# Altium PCB BMW E34 Start-Stop Btn.PcbDoc
Units mm, origin at the board's own origin, x right, y up, seen from the top; angles counter-clockwise.
Board outline 152.4 x 101.6 mm, 2 copper layers (Top Layer, Bottom Layer); 33 components, 16 nets, 88 pads, 5 vias.
Unrouted connection lines stored in the file: 2.
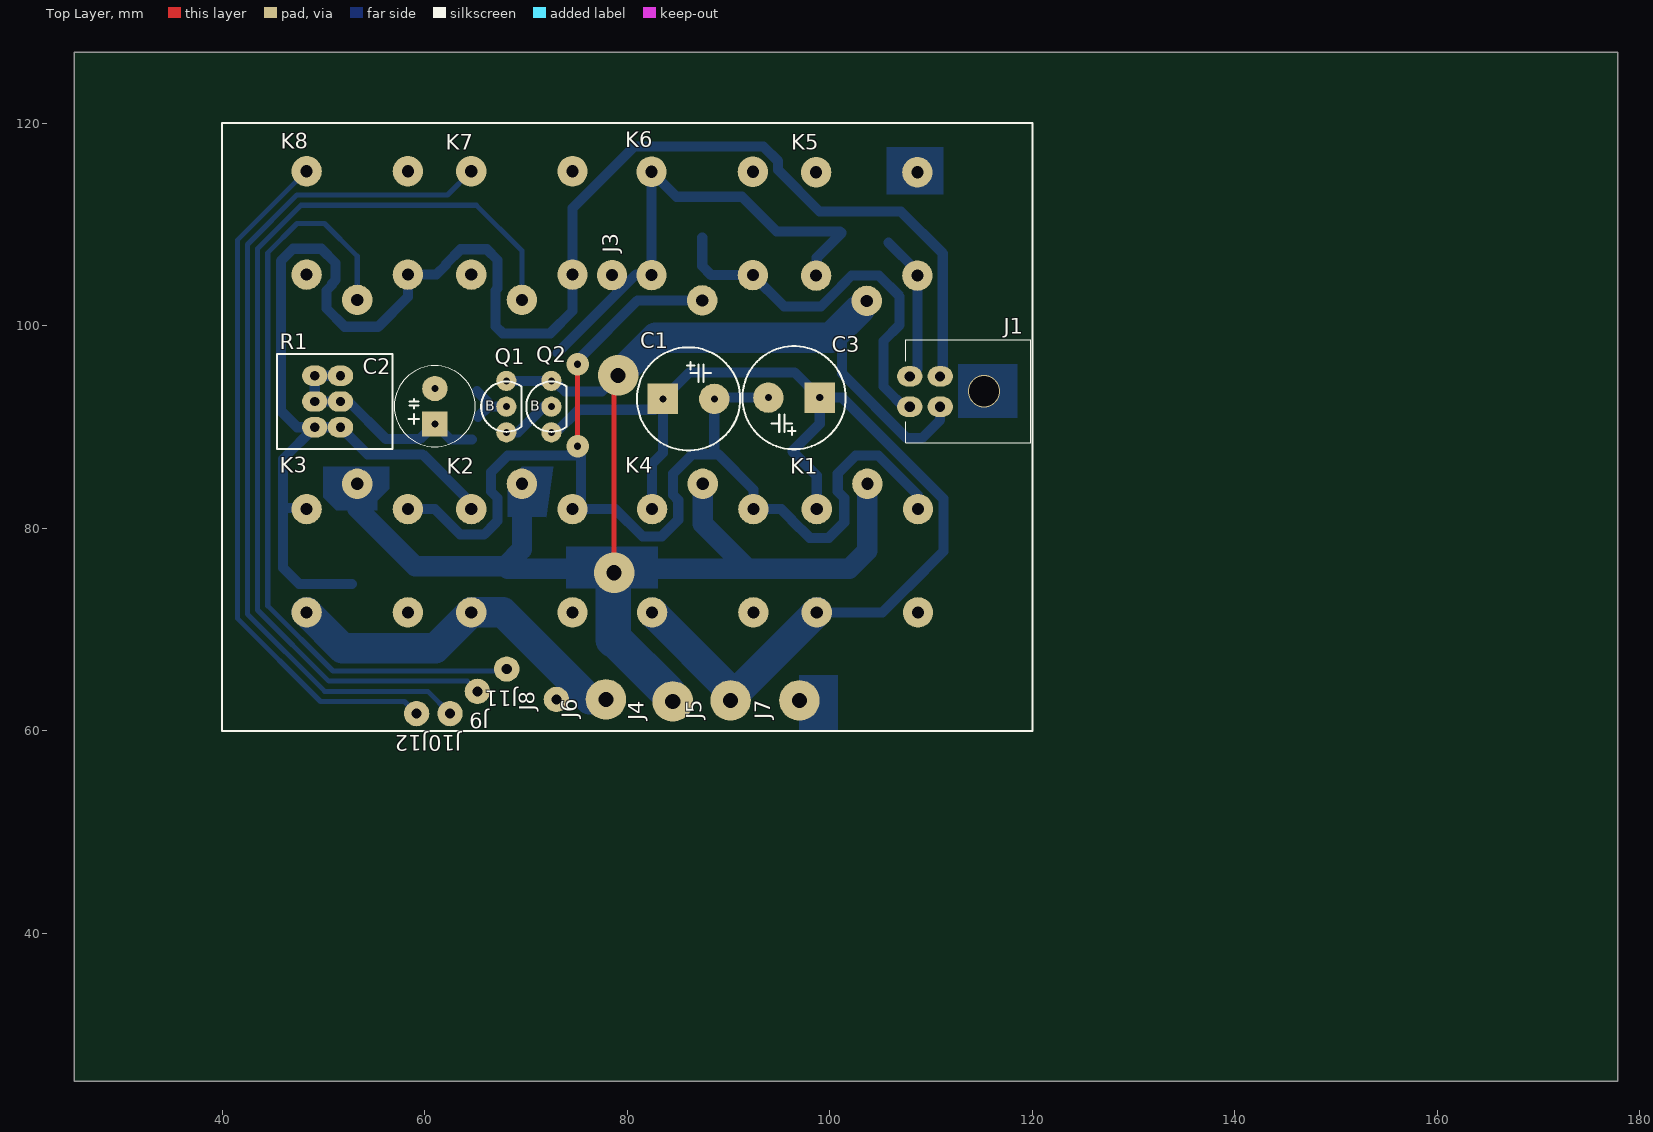
[diagram p0: Top Layer view]
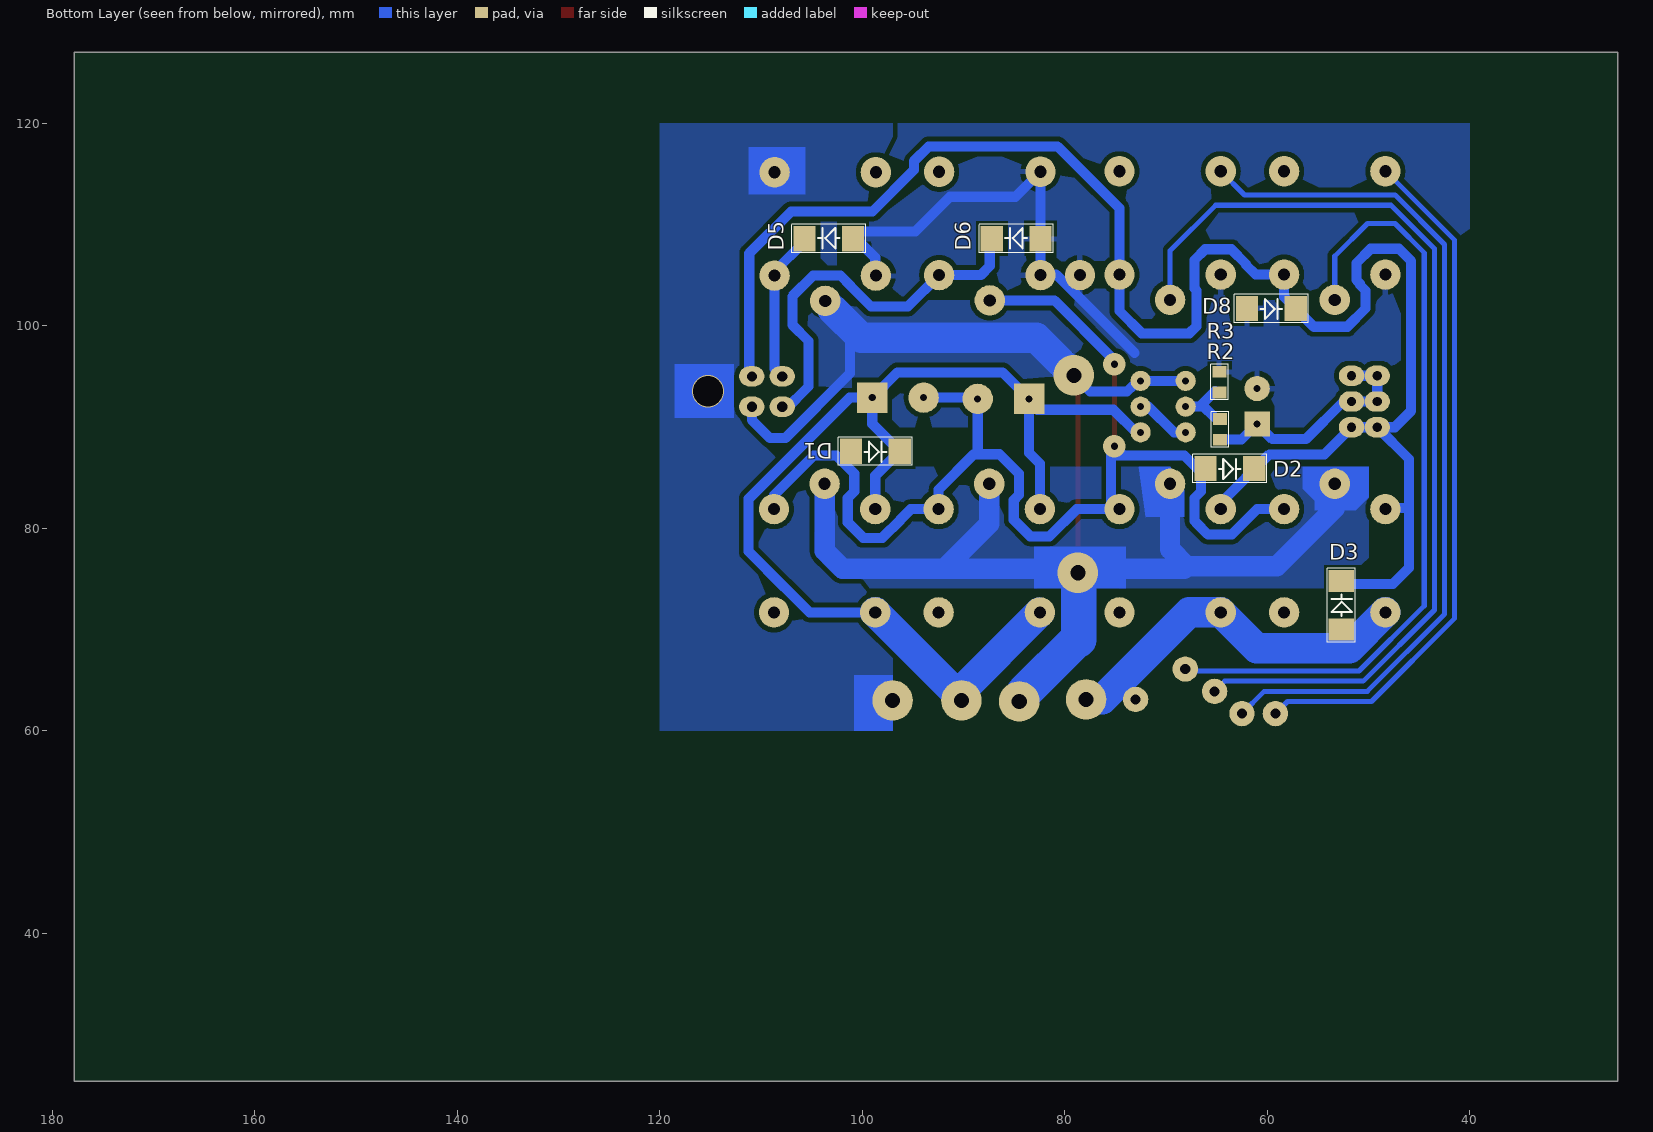
[diagram p1: Bottom Layer view, seen from below]
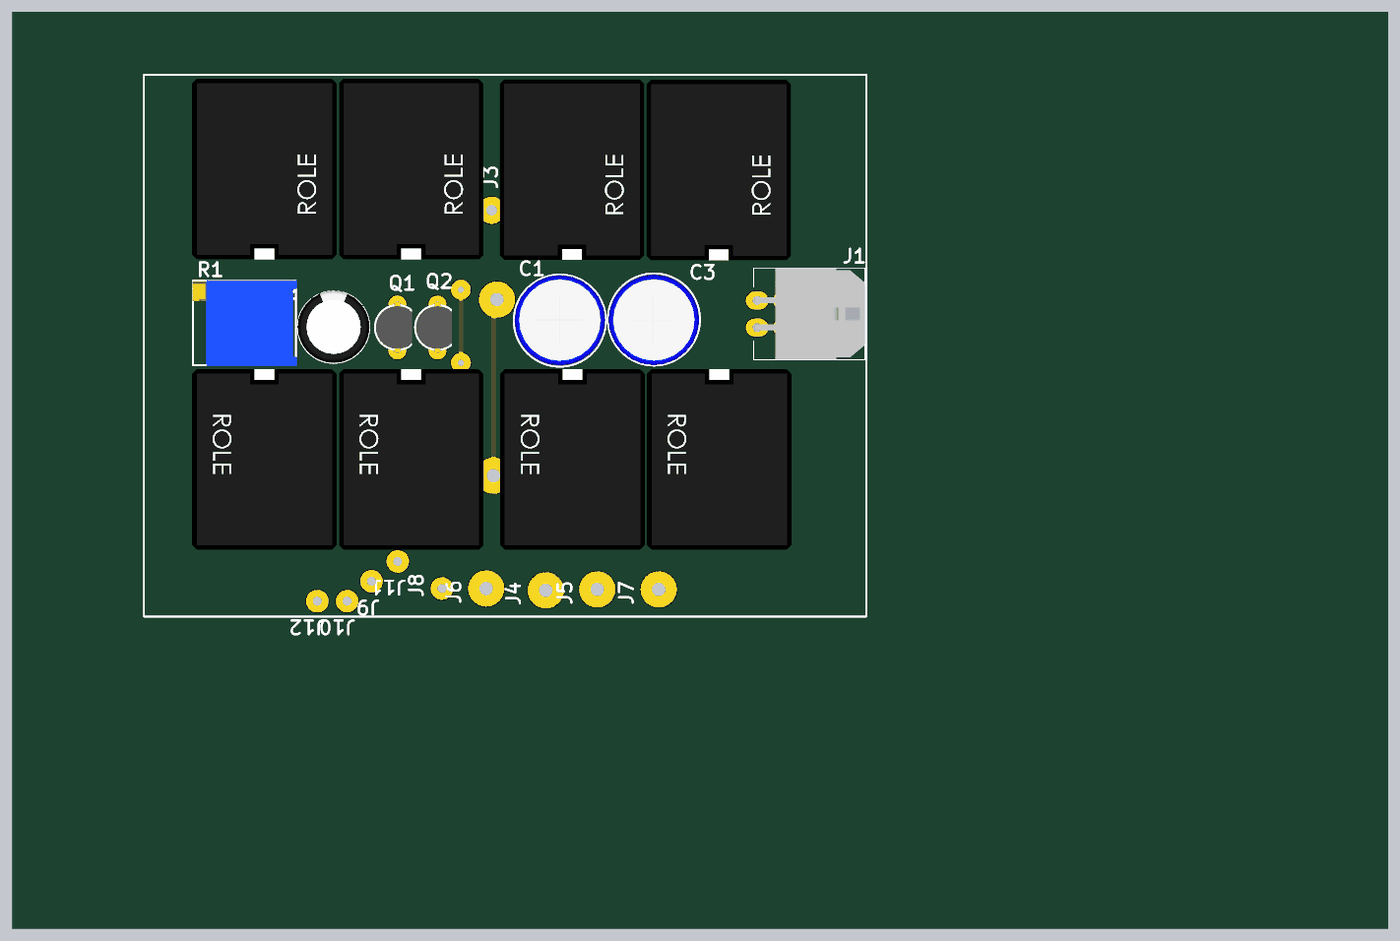
[diagram p2: 3D render of the assembled board from above, using the file's embedded part models]
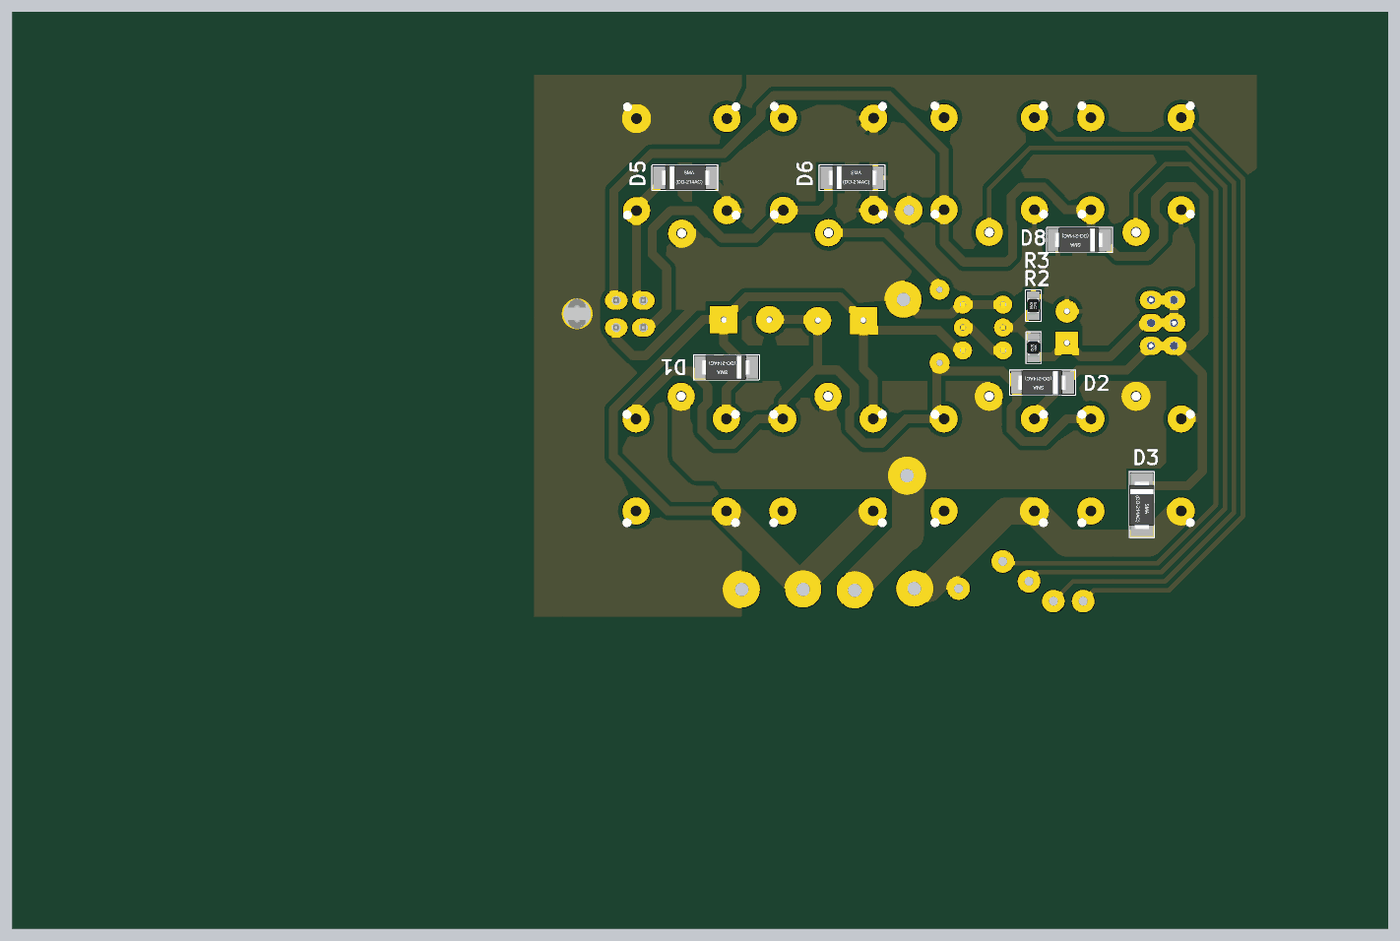
[diagram p3: 3D render of the assembled board from below, using the file's embedded part models]

## Layer stack, top to bottom
Top Solder: solder mask 0.0102, Solder Resist, Dk 3.5
Top Layer: signal copper 0.0356
Dielectric 1: dielectric 0.32, FR-4, Dk 4.8
Bottom Layer: signal copper 0.0356
Bottom Solder: solder mask 0.0102, Solder Resist, Dk 3.5

## Board outline
25.4,25.4 177.8,25.4 177.8,127 25.4,127

## Design rules (kind name [scope] priority, off if disabled: settings)
Clearance [All] p1: gap=0.5
ComponentClearance [All] p1: gap=0 collisioncheckmode=3 verticalgap=0 showdistances=FALSE
PlaneConnect [All] p1: planeconnectstyle=Relief reliefexpansion=0.508 reliefentries=4 reliefconductorwidth=0.5 reliefairgap=0.5
PolygonConnect [All] p1: connectstyle=Relief reliefconductorwidth=0.5 reliefentries=4 polygonreliefangle="90 Angle" airgapwidth=0.5
RoutingVias [All] p1: holewidth=0.711 width=1.27 viastyle="Through Hole" minholewidth=0.711 minwidth=1.27 maxholewidth=0.711 maxwidth=1.27
SolderMaskExpansion [All] p1: expansion=0.102
Width [All] p1: maxlimit=5 minlimit=0.5 preferedwidth=2
27 further rules are at their usual default settings.

## Components (designator, comment, footprint, x,y, rotation, side; value= is the part's Value field where it differs from the comment)
C1 "1000mF" "Cap E p5.08mm D10.2mm (3p)" 83.516,92.773 r0 top
C2 "330uF" "Cap E p3.5mm D8xH12" 61,90.3 r90 top
C3 "1000mF" "Cap E p5.08mm D10.2mm (3p)" 99.01,92.9 r180 top
D1 "S1M" DO-214AC 101.1,87.6 r180 bottom
D2 "S1M" DO-214AC 66.1,85.9 r180 bottom
D3 "S1M" DO-214AC 52.7,70 r90 bottom
D5 "S1M" DO-214AC 100.9,108.6 r0 bottom
D6 "S1M" DO-214AC 82.4,108.6 r0 bottom
D8 "S1M" DO-214AC 62,101.7 r180 bottom
J1 "Ing Button" "Molex Micro-Fit 3.0 - 4 pin D R" 110.9,95 r90 top
J3 "GND" "OnePin 1.2x3" 78.5,105 r90 top
J4 "RED" "OnePin 1.5x4" 84.5,62.9 r90 top
J5 "GREEN" "OnePin 1.5x4" 90.2,63 r90 top
J6 "FIOLET" "OnePin 1.5x4" 77.9,63.1 r90 top
J7 "BL-Y (Starter)" "OnePin 1.5x4" 97,63 r90 top
J8 "Gr-W" "OnePin 1x2.5" 73,63.1 r90 top
J9 "Red-Green" "OnePin 1x2.5" 65.2,63.9 r180 top
J10 "Gray-Green" "OnePin 1x2.5" 62.5,61.7 r180 top
J11 "Red-Blue" "OnePin 1x2.5" 68.1,66.1 r180 top
J12 "Gray-Blue" "OnePin 1x2.5" 59.2,61.7 r180 top
K1 "SRA-12VDC-CL" SRA-12VDC-CL 103.709,84.391 r270 top
K2 "SRA-12VDC-CL" SRA-12VDC-CL 69.597,84.391 r270 top
K3 "SRA-12VDC-CL" SRA-12VDC-CL 53.341,84.391 r270 top
K4 "SRA-12VDC-CL" SRA-12VDC-CL 87.453,84.391 r270 top
K5 "SRA-12VDC-CL" SRA-12VDC-CL 103.653,102.452 r90 top
K6 "SRA-12VDC-CL" SRA-12VDC-CL 87.4,102.5 r90 top
K7 "SRA-12VDC-CL" SRA-12VDC-CL 69.597,102.552 r90 top
K8 "SRA-12VDC-CL" SRA-12VDC-CL 53.341,102.552 r90 top
Q1 "NPN" "TO-92 2.54 (EBC)" 68.064,92.011 r0 top
Q2 "NPN" "TO-92 2.54 (EBC)" 72.509,92.011 r0 top
R1 "47КOm" "Res Adj 3296 Univ" 51.681,89.979 r180 top
R2 "1kOm" "SMD 0805 (2012)" 64.7,90.8 r270 bottom
R3 "100kOm" "SMD 0805 (2012)" 64.7,93.4 r90 bottom

## Footprints (in the part's own frame and the unit in brackets; to place one, negate y for a bottom-side part, rotate by r counter-clockwise, add the part's x,y. Pads: shape width x height; smd on the part's side, far side on the other; paste and mask are expansions set on the pad)
"Cap E p3.5mm D8xH12" [mm] "D 8mm; H 12mm"
  rect 2.5x2.5 hole 0.7: 1(0,0)
  round 2.5 hole 0.7: 2(3.5,0)
  silkscreen extent -2.25,-4 5.75,4, body extent -2.22,-4 5.75,4, height 12.31
"Cap E p5.08mm D10.2mm (3p)" [mm] "D 10.2mm; H 17.5mm, Hole: 0.7mm"
  rect 3x3 hole 0.7: 1(0,0)
  round 3 hole 0.7: 2(5.08,0)
  silkscreen extent -2.56,-5.1 7.64,5.1, body extent -2.49,-4.97 7.57,5.08, height 16.53
DO-214AC [mm]
  rect 2.2x2.5 smd: A(0,0) K(4.8,0)
  silkscreen extent -1.25,-1.4 6.05,1.4, body extent -0.42,-1.4 5.08,1.4, height 2.6
"Molex Micro-Fit 3.0 - 4 pin D R" [mm]
  oval 2x2.5 hole 1: 1(0,0) 2(-3,0) 3(0,3) 4(-3,3)
  silkscreen extent -6.58,-8.95 3.6,3.4, body extent -6.55,-8.94 3.6,3.3, height 8.83
"OnePin 1.2x3" [mm]
  round 3 hole 1.2: 1(0,0)
"OnePin 1.5x4" [mm]
  round 4 hole 1.5: 1(0,0)
"OnePin 1x2.5" [mm]
  round 2.5 hole 1: 1(0,0)
"Res Adj 3296 Univ" [mm]
  oval 2.5x2 hole 0.9: 1(0,0) 1(2.54,0) 2(0,-2.54) 2(2.54,-2.54) 3(0,-5.08) 3(2.54,-5.08)
  Bottom Layer lines w1: 2.54,0 0,0 ; 2.54,-2.54 0,-2.54 ; 2.54,-5.08 0,-5.08
  silkscreen extent -5.15,-7.22 6.25,2.15, body extent -5.22,-7.3 6.32,2.23, height 4.82
"SMD 0805 (2012)" [mil]
  rect 45x55 smd: 1(0.35,0.98) 2(80.35,0.98)
  silkscreen extent -29,-32 109,34, body extent 1,-24 80,26, height 18
SRA-12VDC-CL [mm]
  round 3 hole 1.2: 1(12.7,5) 2(0,0) 3(12.7,-5) 4(2.5,-5) 5(2.5,5)
  body extent -3,-8 17,8, height 15
"TO-92 2.54 (EBC)" [mm] "TO, Flat Index; 3 In-Line, Axial Leads; Body Dia. 4.5mm; Leads 0.51 x 0.48 mm (max)"
  round 2 hole 0.7: B(0,0) C(0,2.54) E(0,-2.54)
  silkscreen extent -2.48,-2.48 1.5,2.48, body extent -2.37,-2.79 1.6,2.79, height 5.7

## Part data
C1 C3: library part "Cap E 1000mF x 25V", "Capacitor"
C2: library part "Cap E 470mF x 25V", "Capacitor"
D1 D2 D3 D5 D6 D8: library part "Diode S1M", "1 Amp General Purpose Rectifier"
J1: library part "Micro-Fit 4R (2x2)", "Horisontal, Dbl line, Male - 3mm"
J3 J4 J5 J6 J7 J8 J9 J10 J11 J12: library part "OnePin Connector", "Only pad"
K1 K2 K3 K4 K5 K6 K7 K8: "Single-Pole Dual-Throw Relay"
Q1 Q2: "NPN Bipolar Transistor"
R1: library part "Res Adj 3296"
R2 R3: library part "Res SMD 0805"

## Via types
v1: diameter 2.2, hole 0.7, Top Layer to Bottom Layer, 2 vias
v2: diameter 4, hole 1.5, Top Layer to Bottom Layer, 2 vias
v3: diameter 3.2, hole 3, Top Layer to Bottom Layer, 1 vias

## Nets (pads, with @x,y where several pads share a name; then routed paths per layer and width w, separated by ;. In a path a pad name is that pad's centre, name@x,y a point inside that pad or via, vN(x,y) a via of type N, cw(c..) or ccw(c..) an arc to the next point about the centre after c; other vN are vias at no path point)
G1GND: C1.2 C3.2 D1.A D2.A K1.5 K2.5 K3.5 K4.5 K6.2 | length 121.2
  Top Layer w0.5: v1(75.1,88.1) v1(75.1,96.2)
  Bottom Layer w1: K3.5 61.009,81.891 63.509,79.391 65.867,79.391 67.057,80.581 ; 67.184,80.708 67.184,82.994 66.549,83.629 66.549,85.534 68.2,87.185 75.417,87.185 75.417,82.711 K2.5 78.809,81.891 81.5,79.2 83.405,79.2 85.04,80.835 85.04,82.772 84.532,83.28 84.532,85.407 86.437,87.312 88.977,87.312 92.453,83.836 K4.5 95.209,81.891 96.209,80.891 96.209,80.855 98.007,79.057 99.899,79.057 101.423,80.581 101.423,82.994 100.788,83.629 100.788,85.407 102.566,87.185 104.794,87.185 108.709,83.27 K1.5 ; 74.185,87.185 v1(75.1,88.1) ; v1@75.4,96.9 81,102.5 K6.2 ; 88.596,87.693 C1.2 ; C1.2@88.723,92.9 C3.2
GND: C2.2 D5.A D6.A D8.A J3.1 K5.5 K6.1 K6.5 K7.5 K8.5 R3.2 | length 46.7
  Bottom Layer w1: K7.5@64.597,104.597 K7.5 ; 73.101,97.3 80.853,105.052 ; K6.5@82.453,104.952 82.453,105 K6.5 K6.1 84.869,112.731 91.333,112.731 94.754,109.31 D5.A@100.986,109.31 ; K5.5@98.709,106.291 98.709,106.723 D5.A@101.169,109.183
GR-B: J12.1 K8.1 | length 68.6
  Bottom Layer w0.5: K8.1 48.309,115.252 41.5,108.443 41.5,71.107 49.707,62.9 58,62.9 J12.1
GR-GR: J10.1 K7.1 | length 85.7
  Bottom Layer w0.5: J10.1 60.3,63.9 50.122,63.9 42.5,71.522 42.5,108.028 47.372,112.9 62.245,112.9 K7.1
"GROUP1 OUT": D3.A J6.1 J8.1 K2.3 K3.3 R1.1 | length 36.1
  Bottom Layer w3: K3.3 51.882,68.15 61.056,68.15 K2.3 67.709,71.691 76.3,63.1 J6.1
GROUP2: C1.1 C3.1 D1.K J5.1 K1.3 K1.4 K4.3 K4.4 Q2.E | length 114.9
  Bottom Layer w1: Q2.E 72.971,89.471 75.2,91.7 82.7,91.7 83.773,92.773 C1.1@84.073,92.773 ; K4.4 82.453,86.376 83.516,87.439 C1.1 86.143,95.4 96.51,95.4 C3.1 99.01,90.31 D1.K 98.709,85.191 K1.4 K1.4@99.01,82.192 ; K1.3 105.173,71.691 107.673,74.191 107.691,74.191 111.209,77.709 111.209,82.927 101.236,92.9 99.391,92.9 C3.1@99.01,93.281
  Bottom Layer w3: K4.3@82.5,71.644 90.344,63.8 90.818,63.8 K1.3
I-OFF: D6.K J1.4 K6.4 | length 38.9
  Bottom Layer w1: D6.K@87.4,108.7 87.4,105.9 88.3,105 K6.4 95.5,101.9 99.137,101.9 101.153,103.916 101.153,103.953 102.152,104.952 104.848,104.952 106.9,102.9 106.9,100.1 105.3,98.5 105.3,94 J1.4@107.6,91.7
I-ON: D2.K D3.K D8.K J1.1 K2.4 K3.4 K7.4 K8.4 | length 176
  Bottom Layer w1: K3.4@48.232,82 46,82 ; 51.681,89.979 54.36,87.3 59.8,87.3 64.597,82.503 K2.4 ; D3.K@52.8,74.5 47.6,74.5 46,76.1 46,82 ; J1.1 111.153,95.253 111.153,107.147 107.016,111.284 98.985,111.284 94.9,115.369 94.9,116.236 93.436,117.7 80.7,117.7 74.597,111.597 K7.4 74.597,101.456 72.391,99.25 67.692,99.25 67,99.942 67,103.491 67.184,103.675 67.184,106.489 66.121,107.552 63.561,107.552 62.097,106.088 62.097,105.997 61.152,105.052 K8.4 58.341,102.841 55.4,99.9 52.1,99.9 50.3,101.7 50.3,103.475 50.841,104.016 50.841,104.141 51.2,104.5 51.2,106.2 49.8,107.6 47,107.6 45.8,106.4 45.8,91.6 47.421,89.979 49.141,89.979 46,86.838 46,82
NetC2_1: C2.1 R1.2 R1.3 R2.2 | length 18.3
  Bottom Layer w1: R1.2@49.141,92.519 R1.3@49.141,95.059 ; R1.2@51.681,92.519 52.481,92.519 56.2,88.8 59.5,88.8 C2.1 62.541,88.759 R2.2
NetQ1_B: Q1.B R2.1 R3.1 | length 5.4
  Bottom Layer w1: R3.1@65.168,93.544 66.701,92.011 ; R2.1@65.245,90.986 66.27,92.011 66.701,92.011 ; Q1.B 66.701,92.011
NetQ1_E: Q1.E Q2.B | length 5.5
  Bottom Layer w1: Q1.E 69.207,89.471 71.747,92.011 Q2.B
R-B: J11.1 K8.2 | length 76.9
  Bottom Layer w0.5: K8.2 53.341,106.859 50.1,110.1 47.4,110.1 44.5,107.2 44.5,72.35 50.95,65.9 67.9,65.9 J11.1
R-GR: J9.1 K7.2 | length 95.5
  Bottom Layer w0.5: J9.1 64.2,64.9 50.536,64.9 43.5,71.936 43.5,107.614 47.786,111.9 65.1,111.9 69.597,107.403 K7.2 K7.2@69.736,102.691
"STARTER OUT": J7.1 K5.3
STARTERON: D5.K J1.3 K5.4 | length 14.7
  Bottom Layer w1: D5.K@105.786,108.214 108.653,105.347 K5.4 108.65,104.949 108.65,95.75 J1.3
VCC: J1.2 J4.1 K1.2 K2.2 K3.2 K4.2 K5.2 Q1.C Q2.C | length 179.3
  Top Layer w0.5: v2(78.7,75.6) v2@78.7,95 ; v2(79.1,95.1) v2@79.1,96.7
  Bottom Layer w1: Q1.C Q2.C ; 73.348,94 73.848,93.5 77.5,93.5 v2@79.2,95.2 ; K5.2@103.6,102.452 101.2,100.052 101.2,95.3 107.6,88.9 109.1,88.9 110.9,90.7 J1.2 ; K5.2@103.653,101.147 K5.2
  Bottom Layer w2: K3.2 53.341,81.978 59.056,76.263 67.946,76.263 69.597,77.914 K2.2 ; 68.2,76.009 78.8,76.009 91.898,76.009 ; J4.1@84,62.8 J4.1@84,63.8 ; K4.2 87.453,80.454 91.898,76.009 ; K1.2 103.709,77.787 101.931,76.009 91.898,76.009
  Bottom Layer w3: v2(79.1,95.1) 82.8,98.8 100.1,98.8 K5.2@102.952,101.652
  Bottom Layer w3.5: 78.6,69 v2@78.6,76.009 ; 78.8,69 J4.1@84,63.8
pads on no net: K1.1 K2.1 K3.1 K4.1 K5.1 K6.3 K7.3 K8.3
copper on no net:
  other v3: 115.225,93.525

## Polygon pours and split planes (outlines as drawn)
GND on Bottom Layer "Top Layer-No Net" (solid, pour order 8): 40,120 101,120 101.5,119.5 101.5,90 40,90
VCC on Bottom Layer "Top Layer-No Net" (solid, pour order 6): 50,86.1 110.1,86.1 110.1,74.1 50,74.1
VCC on Bottom Layer "Top Layer-No Net" (solid, pour order 4): 78.1,93.9 108,93.9 108,102.5 78.1,102.5
"STARTER OUT" on Bottom Layer "Top Layer-No Net" (solid, pour order 2): 97,60 97,67.5 97,120 120,120 120,60

## Other copper
Bottom Layer:
  region net VCC: 56.5,86.1 50,86.1 50,83.072 51.272,81.8 55.3,81.8 55.3,82.7 56.5,83.9
  region net VCC: 69.6,86.1 72.7,86.1 72,81.1 68.185,81.135 68.2,83.8
  region net VCC: 83,74.1 74,74.1 74,78.2 83,78.2
  region net "STARTER OUT": 105.6,117.6 111.2,117.6 111.2,113 105.6,113
  region net "STARTER OUT": 97,65.5 97,60 100.8,60 100.8,65.5
  region net "STARTER OUT": 112.7,90.9 112.7,96.2 118.5,96.2 118.5,90.9

## Silkscreen, mask and mechanical layers (free items; w line width, h text height)
Top Overlay:
  lines w0.2: 40,60 40,120 120,120 120,60 40,60

## Text inside footprints (layer, text, board x,y; h text height)
Q1: Top Overlay "B" at 65.964,91.586 h1
Q2: Top Overlay "B" at 70.409,91.586 h1